# Altium PCB PCB_Project.PcbDoc
Units mil, origin at the board's own origin, x right, y up, seen from the top; angles counter-clockwise.
Board outline 3000 x 2000 mil, 2 copper layers (Top Layer, Bottom Layer); 9 components, 9 nets, 30 pads, 0 vias.
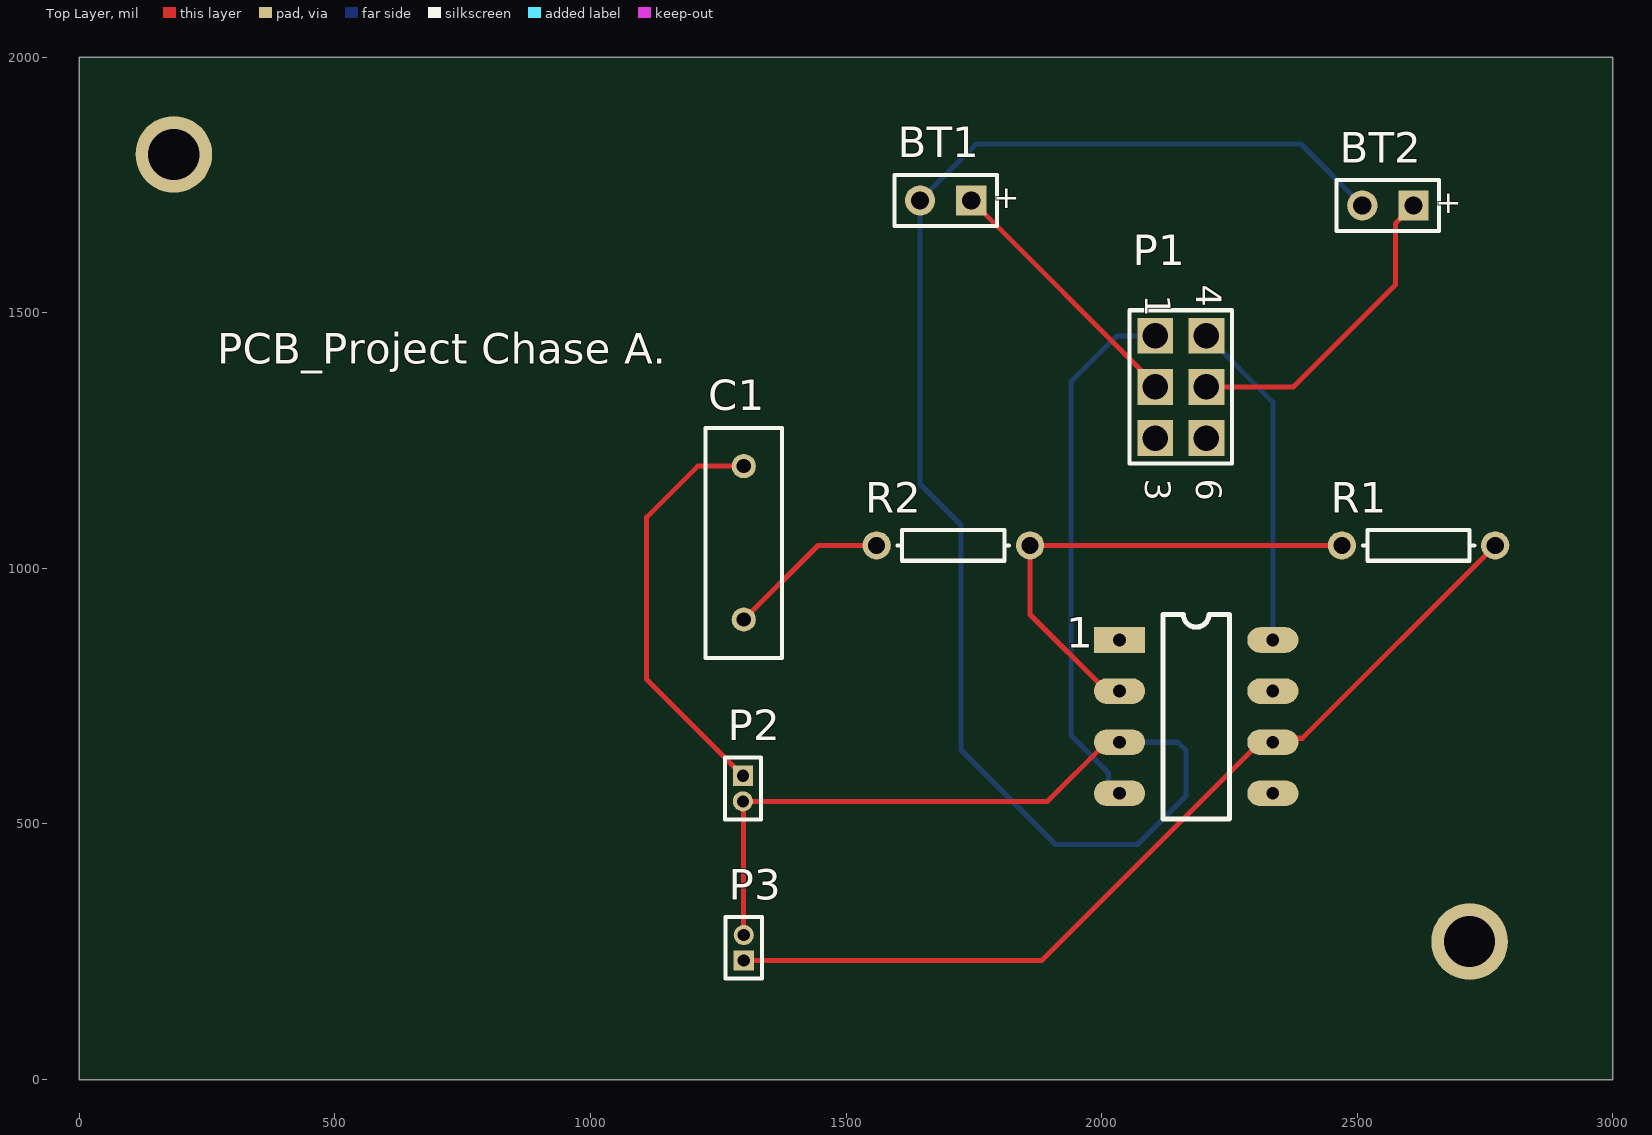
[diagram p0: Top Layer view]
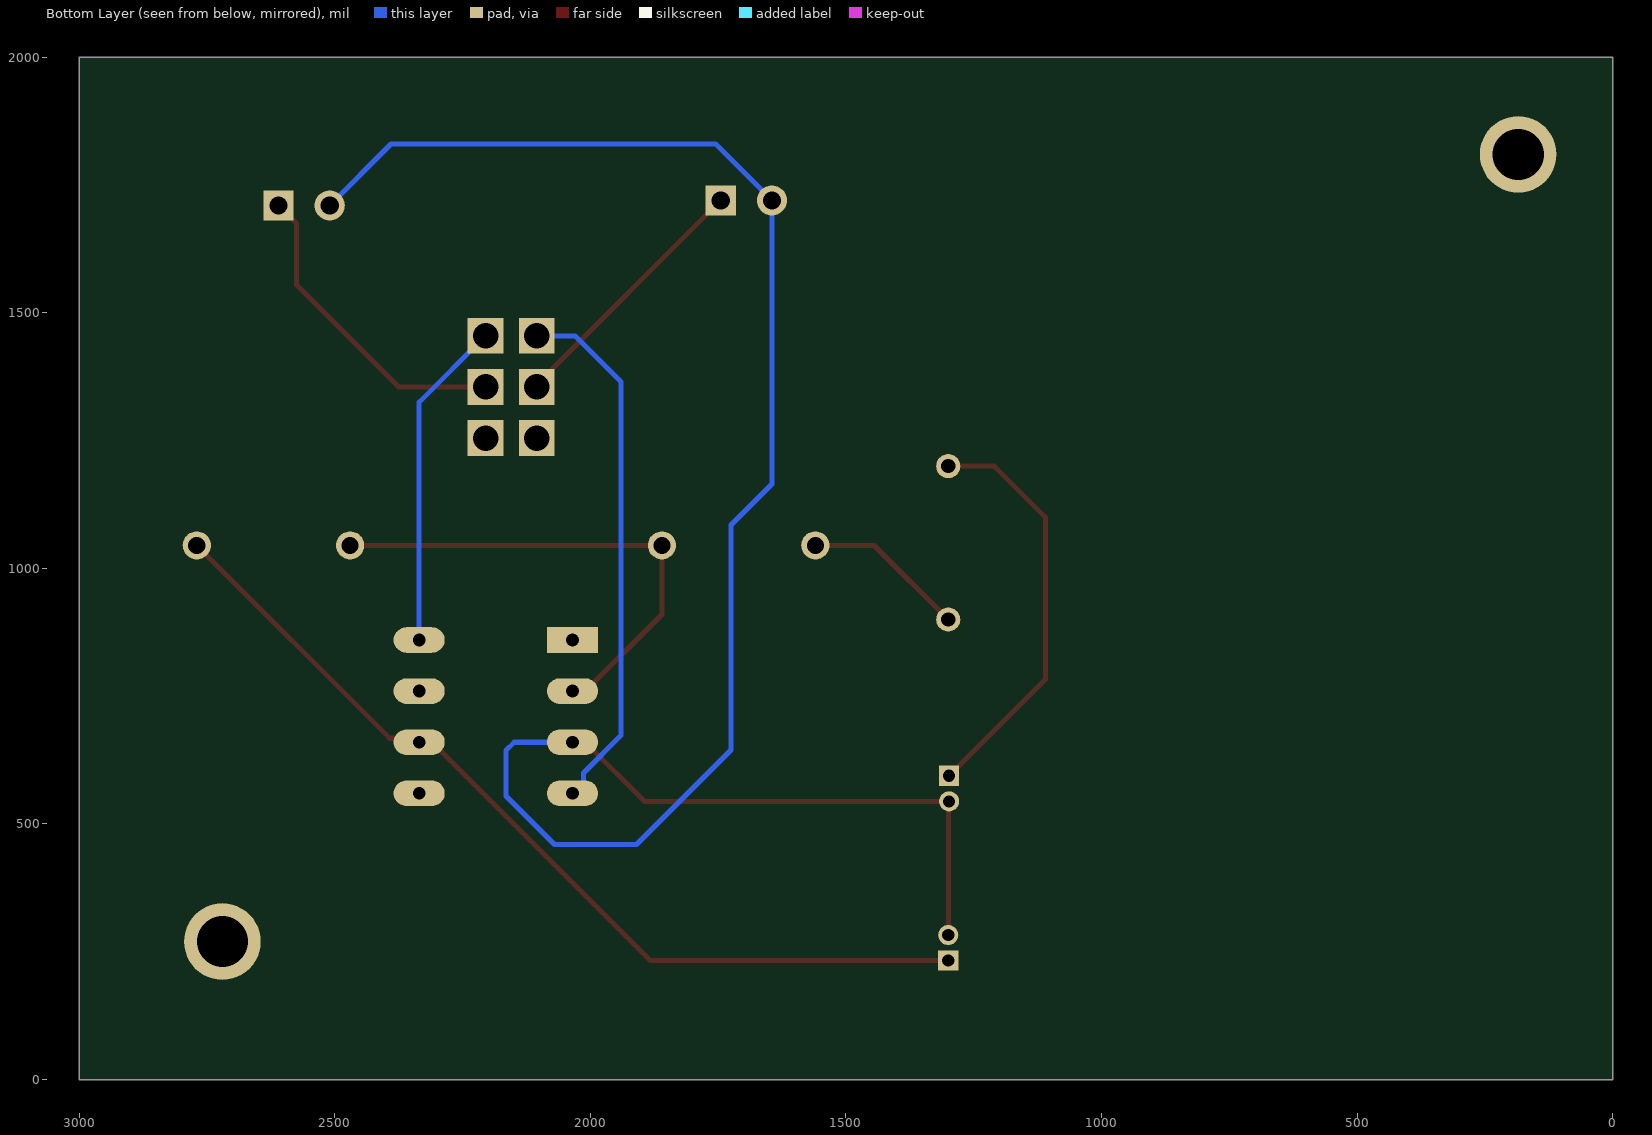
[diagram p1: Bottom Layer view, seen from below]

## Layer stack, top to bottom
Top Solder: solder mask 0.4, Solder Resist, Dk 3.5
Top Layer: signal copper 1.4
Dielectric 1: dielectric 12.6, FR-4, Dk 4.8
Bottom Layer: signal copper 1.4
Bottom Solder: solder mask 0.4, Solder Resist, Dk 3.5

## Board outline
0,0 3000,0 3000,2000 0,2000

## Design rules (kind name [scope] priority, off if disabled: settings)
Clearance [All] p1: gap=10 ignorepadtopadclearanceinfootprint=FALSE except(0: Arc-Hole Track-Hole SMDPad-Hole THPad-Hole Via-Hole Fill-Hole Poly-Hole Region-Hole Text-Hole)
PolygonConnect [All] p1: connectstyle=Relief reliefconductorwidth=10 reliefentries=4 polygonreliefangle="90 Angle" airgapwidth=10
RoutingVias [All] p1: holewidth=28 width=50 viastyle="Through Hole" minholewidth=28 minwidth=50 maxholewidth=28 maxwidth=50
SolderMaskExpansion [All] p1: expansion=4 istentingtop=FALSE
Width [All] p1: maxlimit=10 minlimit=10 preferedwidth=10
30 further rules are at their usual default settings.

## Components (designator, comment, footprint, x,y, rotation, side; value= is the part's Value field where it differs from the comment)
1 "Op Amp" "Op Amp" 2035,860 r0 top
BT1 "Battery" BAT-2 1695,1720 r180 top
BT2 "Battery" BAT-2 2560,1710 r180 top
C1 "Cap" RAD-0.3 1300,1050 r270 top value=100pF
P1 "Power Switch" HDR2X3_CEN 2105,1455 r270 top
P2 "Input" MHDR1X2 1298.35,594.37 r270 top
P3 "Output" MHDR1X2 1300,232.82 r90 top
R1 "Res1" AXIAL-0.3 2620,1045 r0 top value=1K
R2 "Res1" AXIAL-0.3 1710,1045 r0 top value=1K

## Footprints (in the part's own frame and the unit in brackets; to place one, negate y for a bottom-side part, rotate by r counter-clockwise, add the part's x,y. Pads: shape width x height; smd on the part's side, far side on the other; paste and mask are expansions set on the pad)
AXIAL-0.3 [mm] "Axial Device, Thru-Hole; 2 Leads; 0.3 in Pin Spacing"
  round 1.4 hole 0.85: 1(-3.81,0) 2(3.81,0)
  silkscreen extent -2.77,-0.76 2.77,0.76
BAT-2 [mm] "Battery; 2 Leads"
  rect 1.5x1.5 hole 0.9: 1(-1.27,0)
  round 1.5 hole 0.9: 2(1.27,0)
  silkscreen extent -2.54,-1.27 2.54,1.27
HDR2X3_CEN [mil] "Connector; Header; 3x2 Position"
  rect 70x70 hole 50: 1(0,0) 2(100,0) 3(200,0) 4(0,100) 5(100,100) 6(200,100)
  silkscreen extent -50,-50 250,150
MHDR1X2 [mm] "Connector; Header; 2 Position"
  rect 1x1 hole 0.6: 1(0,0)
  round 1 hole 0.6: 2(1.27,0)
  silkscreen extent -0.9,-0.9 2.17,0.9
"Op Amp" [mil]
  rect 100x50 hole 25: 1(0,0)
  oval 100x50 hole 25: 2(0,-100) 3(0,-200) 4(0,-300) 5(300,-300) 6(300,-200) 7(300,-100) 8(300,0)
  silkscreen extent 85,-350 215,50
RAD-0.3 [mm] "Radial Cap, Thru-Hole; 2 Leads; 0.3 in Pin Spacing"
  round 1.2 hole 0.7: 1(-3.81,0) 2(3.81,0)
  silkscreen extent -5.71,-1.91 5.71,1.91

## Part data
1: library part Component_1
BT1 BT2: "Multicell Battery", LatestRevisionDate=17-Jul-2002, LatestRevisionNote="Re-released for DXP Platform.", PackageDescription="Battery; 2 Leads", PackageReference=BAT-2, Published=24-Mar-1999, Publisher="Altium Limited"
C1: "Capacitor", LatestRevisionDate=17-Jul-2002, LatestRevisionNote="Re-released for DXP Platform.", PackageDescription="Radial Cap, Thru-Hole; 2 Leads; 0.3 in Pin Spacing", PackageReference=RAD-0.3, Published=8-Jun-2000, Publisher="Altium Limited"
P1: library part "Header 3X2A", "Header, 3-Pin, Dual row", LatestRevisionDate=17-Jul-2002, LatestRevisionNote="Re-released for DXP Platform.", Publisher="Altium Limited"
P2 P3: library part MHDR1X2, "Header, 2-Pin", LatestRevisionDate=17-Jul-2002, LatestRevisionNote="Re-released for DXP Platform.", Publisher="Altium Limited"
R1 R2: "Resistor", LatestRevisionDate=17-Jul-2002, LatestRevisionNote="Re-released for DXP Platform.", PackageDescription="Axial Device, Thru-Hole; 2 Leads; 0.3 in Pin Spacing", PackageReference=AXIAL-0.3, Published=8-Jun-2000, Publisher="Altium Limited"

## Free pads (board coordinates)
  round 150 hole 100: 1(185,1810) 2(2720,270)

## Nets (pads, with @x,y where several pads share a name; then routed paths per layer and width w, separated by ;. In a path a pad name is that pad's centre, name@x,y a point inside that pad or via, vN(x,y) a via of type N, cw(c..) or ccw(c..) an arc to the next point about the centre after c; other vN are vias at no path point)
+9: 1.8 P1.4 | length 648.8
  Bottom Layer w10: P1.4 2335,1325 1.8
-9: 1.4 P1.1 | length 1048.4
  Bottom Layer w10: 1.4 2031.91,560 2013.43,578.48 2013.43,600 1940,673.43 1940,1365 2030,1455 P1.1
GND: 1.3 BT1.2 BT2.2 P2.2 P3.2 | length 3896.9
  Top Layer w10: P3.2 1299.17,283.65 1299.17,543.54 P2.2 1894.37,544.37 2010,660 1.3
  Bottom Layer w10: 1.3 2149.14,660 2165,644.14 2165,555 2070,460 1910,460 1725,645 1725,1085 1645,1165 BT1.2 1755,1830 2390,1830 BT2.2
Net1_2: 1.2 R1.1 R2.2 | length 982.1
  Top Layer w10: 1.2 2010,760 1860,910 R2.2 R1.1
Net1_6: 1.6 P3.1 R1.2 | length 1806.4
  Top Layer w10: P3.1 1882.82,232.82 2310,660 1.6 2342.65,667.65 2392.65,667.65 R1.2
NetBT1_1: BT1.1 P1.2 | length 514.1
  Top Layer w10: BT1.1 2105,1360 P1.2
NetBT2_1: BT2.1 P1.5 | length 622.3
  Top Layer w10: P1.5 2375,1355 2575,1555 2575,1675 BT2.1
NetC1_1: C1.1 P2.1 | length 815.1
  Top Layer w10: P2.1 1110,782.72 1110,1100 1210,1200 C1.1
NetC1_2: C1.2 R2.1 | length 320.1
  Top Layer w10: C1.2 1445,1045 R2.1
pads on no net: 1.1 1.5 1.7 P1.3 P1.6

## Silkscreen, mask and mechanical layers (free items; w line width, h text height)
Top Overlay:
  text "PCB_Project Chase A." at 270,1400 h60
  text "Please excuse the sub-par routing technique, it is the best I could do before dinner!" at 115,170 h60
Mechanical 1:
  the board outline again, w10

## Text inside footprints (layer, text, board x,y; h text height)
BT1: Top Overlay "+" at 1839.49,1742.72 h45.28 r180
BT2: Top Overlay "+" at 2704.49,1732.72 h45.28 r180
P1: Top Overlay "4" at 2185,1555 h50 r270; Top Overlay "1" at 2085,1535 h50 r270; Top Overlay "3" at 2085,1175 h50 r270; Top Overlay "6" at 2185,1175 h50 r270